# EAGLE board power_1.0 (EAGLE 9.5.2)
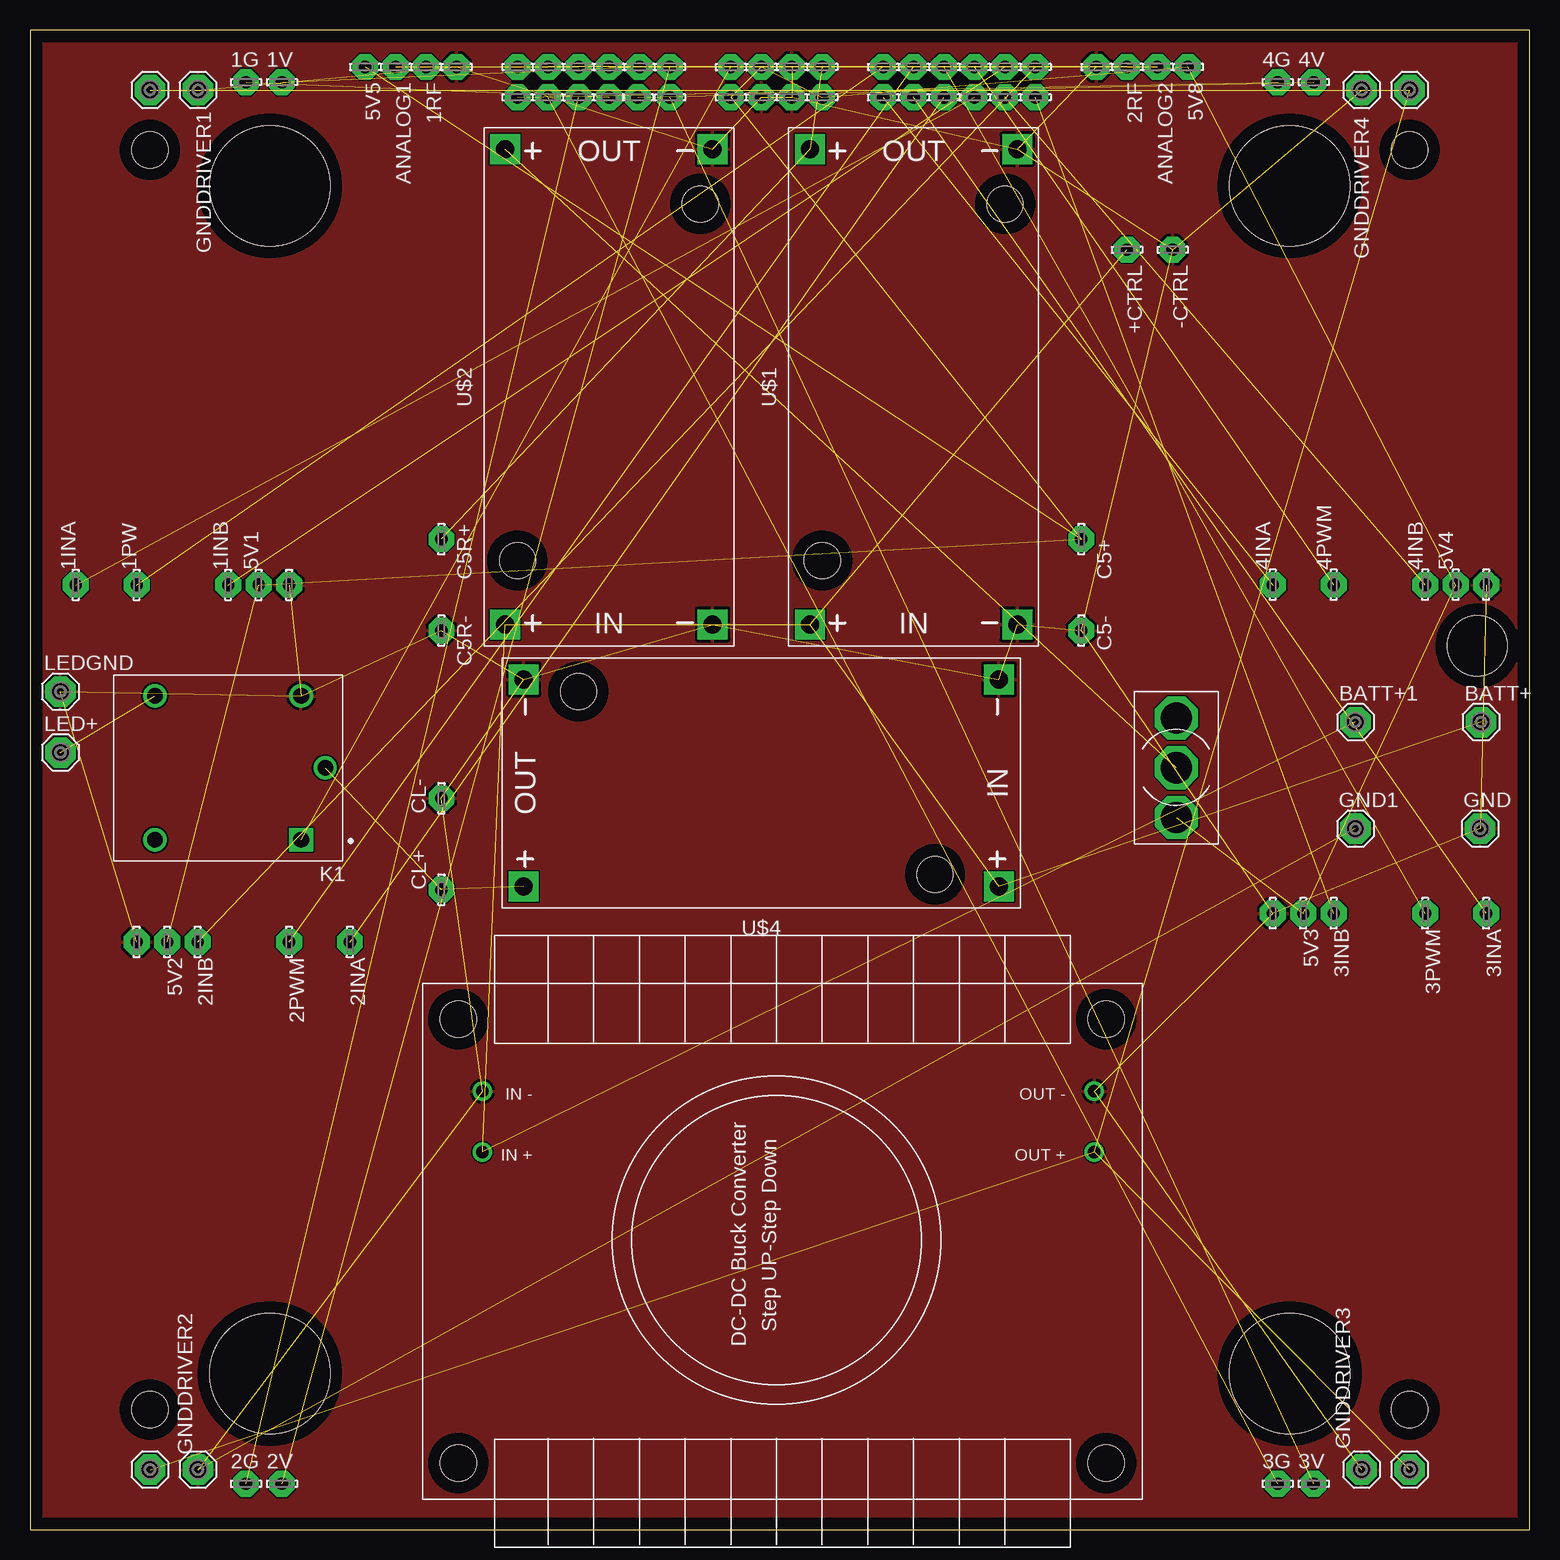
[diagram p0: board, top side]
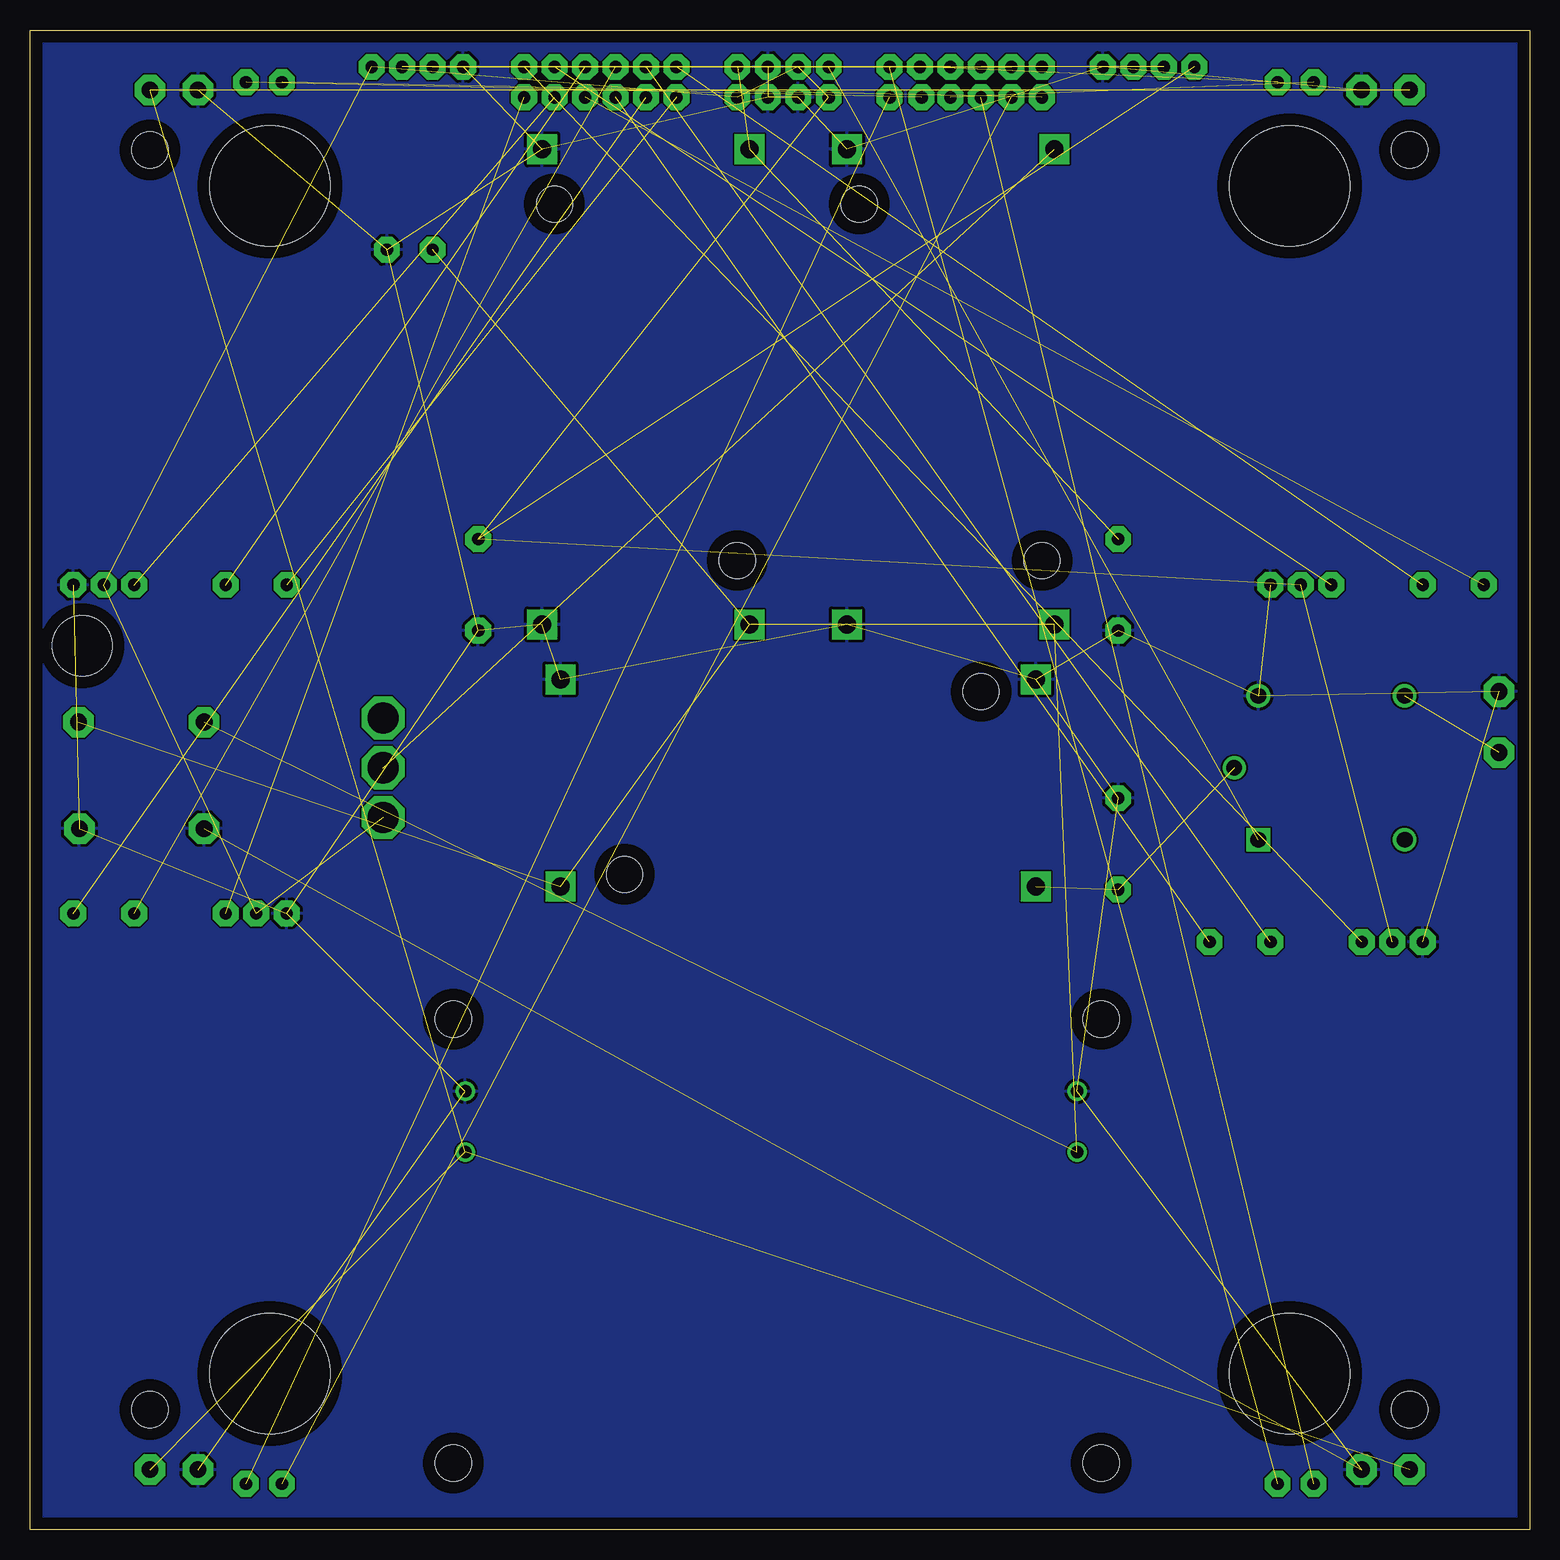
[diagram p1: board, bottom side, seen from below]

Size 125 x 125 mm. Coordinates in mm from the lower left corner, seen from the top.
Outline: 0,0 125,0 125,125 0,125 0,0
Copper layers (1*16): Top 0.035mm / dielectric 1.5mm / Bottom 0.035mm
Design rules "default": minimum track width 6mil, minimum drill 0.35mm, track to track 6mil, track to pad 6mil, pad to pad 6mil, via to via 6mil, smd to smd 6mil, copper to edge 40mil, drill to drill 6mil, minimum pad ring 10mil, minimum via ring 8mil, stop-mask expansion 4mil, vias tented up to drill 0mil, thermal gap 10mil
Net classes: 1 power: width 3 mm, clearance 1 mm
Holes 3 mm at 10,10 10,115 115,10 115,115
Holes 5 mm at 120.65,73.66
Holes 10 mm at 20,13 105,13 105,112 20,112

## Footprints (pad centres in the part's own frame; a part is rotated, then mirrored left to right if it is on the bottom)
LSP10 = drill 1.016 pad 2.159 octagon: MP 0,0
SE14 = drill 1.397 pad 2.54 octagon: MP 0,0
RELAY_SRD-05VDC-SL-C = drill 1.32 square: A1 -6.1,6 | drill 1.32: A2 -6.1,-6; NC 6.1,6; NO 6.1,-6 | drill 1.29: COM -8.1,0
DC-DC-STEP-DOWN-LM2596 = drill 1.5 pad 2.5 square: IN+ -19.812,8.636; IN- -19.812,-8.636; OUT+ 19.812,8.636; OUT- 19.812,-8.636 | hole 3: -14.478,7.62; 15.24,-7.62
DC-DCSTEPUP/DOWNBUCKCONVERTER = drill 1.067: IN+ 28.92,55; IN- 34,55; OUT+ 28.92,4; OUT- 34,4 | hole 3: 3,3; 40,3; 3,57; 40,57
SINGLE_SWITCH = drill 2.6 octagon: A0 2.2,3.5; A1 10.5,3.5; INT 6.35,3.5

## Placement (x,y rotation side)
1G  LSP10  [LSP10]  18,120.65 0 top
1G1  LSP10  [LSP10]  48.26,119.38 0 top
1INA  LSP10  [LSP10]  3.81,78.75 90 top
1INA1  LSP10  [LSP10]  78.74,119.38 0 top
1INB  LSP10  [LSP10]  16.51,78.75 90 top
1INB1  LSP10  [LSP10]  81.28,121.92 0 top
1PW  LSP10  [LSP10]  8.89,78.75 90 top
1PW1  LSP10  [LSP10]  71.12,121.92 0 top
1RF  LSP10  [LSP10]  33.02,121.92 0 top
1RF1  LSP10  [LSP10]  40.64,121.92 0 top
1V  LSP10  [LSP10]  21,120.65 0 top
1V1  LSP10  [LSP10]  50.8,121.92 0 top
2G  LSP10  [LSP10]  18,3.81 0 top
2G1  LSP10  [LSP10]  45.72,119.38 0 top
2INA  LSP10  [LSP10]  26.67,48.97 270 top
2INA1  LSP10  [LSP10]  76.2,119.38 0 top
2INB  LSP10  [LSP10]  13.97,48.97 270 top
2INB1  LSP10  [LSP10]  83.82,121.92 0 top
2PWM  LSP10  [LSP10]  21.59,48.97 270 top
2PWM1  LSP10  [LSP10]  73.66,121.92 0 top
2RF  LSP10  [LSP10]  91.44,121.92 0 top
2RF1  LSP10  [LSP10]  43.18,121.92 0 top
2V  LSP10  [LSP10]  21,3.81 0 top
2V1  LSP10  [LSP10]  53.34,121.92 0 top
3G  LSP10  [LSP10]  104,3.81 0 top
3G1  LSP10  [LSP10]  43.18,119.38 0 top
3INA  LSP10  [LSP10]  121.38,51.36 270 top
3INA1  LSP10  [LSP10]  73.66,119.38 0 top
3INB  LSP10  [LSP10]  108.68,51.36 270 top
3INB1  LSP10  [LSP10]  83.82,119.38 0 top
3PWM  LSP10  [LSP10]  116.3,51.36 270 top
3PWM1  LSP10  [LSP10]  76.2,121.92 0 top
3RF1  LSP10  [LSP10]  45.72,121.92 0 top
3V  LSP10  [LSP10]  107,3.81 0 top
3V1  LSP10  [LSP10]  53.34,119.38 0 top
4G  LSP10  [LSP10]  104,120.65 0 top
4G1  LSP10  [LSP10]  40.64,119.38 0 top
4INA  LSP10  [LSP10]  103.6,78.75 270 top
4INA1  LSP10  [LSP10]  71.12,119.38 0 top
4INB  LSP10  [LSP10]  116.3,78.75 270 top
4INB1  LSP10  [LSP10]  81.28,119.38 0 top
4PWM  LSP10  [LSP10]  108.68,78.75 270 top
4PWM1  LSP10  [LSP10]  78.74,121.92 0 top
4RF1  LSP10  [LSP10]  48.26,121.92 0 top
4V  LSP10  [LSP10]  107,120.65 0 top
4V1  LSP10  [LSP10]  50.67,119.38 0 top
5V  LSP10  [LSP10]  60.96,121.92 0 top
5V1  LSP10  [LSP10]  19.05,78.75 90 top
5V2  LSP10  [LSP10]  11.43,48.97 270 top
5V3  LSP10  [LSP10]  106.14,51.36 270 top
5V4  LSP10  [LSP10]  118.84,78.75 270 top
5V5  LSP10  [LSP10]  27.94,121.92 0 top
5V8  LSP10  [LSP10]  96.52,121.92 0 top
5V9  LSP10  [LSP10]  58.42,119.38 0 top
5V10  LSP10  [LSP10]  66.04,119.38 0 top
+CTRL  LSP10  [LSP10]  91.44,106.68 0 top
-CTRL  LSP10  [LSP10]  95.25,106.68 0 top
ANALOG1  LSP10  [LSP10]  30.48,121.92 0 top
ANALOG2  LSP10  [LSP10]  93.98,121.92 0 top
BATT+  SE14  [SE14]  120.96,67.31 0 top
BATT+1  SE14  [SE14]  110.49,67.31 0 top
C5+  LSP10  [LSP10]  87.63,82.55 270 top
C5-  LSP10  [LSP10]  87.63,74.93 270 top
C5-2  LSP10  [LSP10]  60.96,119.38 0 top
C5-3  LSP10  [LSP10]  63.5,119.38 0 top
C5R+  LSP10  [LSP10]  34.29,82.55 270 top
C5R-  LSP10  [LSP10]  34.29,74.93 270 top
CL+  LSP10  [LSP10]  34.29,53.34 90 top
CL-  LSP10  [LSP10]  34.29,60.96 90 top
GND  SE14  [SE14]  120.88,58.42 0 top
GND1  SE14  [SE14]  110.49,58.42 0 top
GNDDRIVER1  SE14  [SE14]  14,120 0 top
GNDDRIVER2  SE14  [SE14]  14,5 0 top
GNDDRIVER3  SE14  [SE14]  111,5 0 top
GNDDRIVER4  SE14  [SE14]  111,120 0 top
K1  SRD-05VDC-SL-C  [RELAY_SRD-05VDC-SL-C]  16.51,63.5 180 top
LED+  SE14  [SE14]  2.54,64.77 0 top
LEDGND  SE14  [SE14]  2.54,69.85 0 top
LSP1  LSP10  [LSP10]  21.59,78.75 90 top
LSP2  LSP10  [LSP10]  8.89,48.97 270 top
LSP4  LSP10  [LSP10]  103.6,51.36 270 top
LSP6  SE14  [SE14]  115,5 0 top
LSP7  SE14  [SE14]  10,5 0 top
LSP8  SE14  [SE14]  115,120 0 top
LSP9  SE14  [SE14]  10,120 0 top
LSP10  LSP10  [LSP10]  121.38,78.75 270 top
LSP12  LSP10  [LSP10]  88.9,121.92 0 top
LSP13  LSP10  [LSP10]  35.56,121.92 0 top
LSP14  LSP10  [LSP10]  63.5,121.92 0 top
MOSFET  LSP10  [LSP10]  58.42,121.92 0 top
RASPY5V  LSP10  [LSP10]  66.04,121.92 0 top
U$1  DC-DC-STEP-DOWN-LM2596  [DC-DC-STEP-DOWN-LM2596]  73.66,95.25 90 top
U$2  DC-DC-STEP-DOWN-LM2596  [DC-DC-STEP-DOWN-LM2596]  48.26,95.25 90 top
U$3  DC-DCSTEPUP/DOWNBUCKCONVERTER  [DC-DCSTEPUP/DOWNBUCKCONVERTER]  92.71,2.54 90 top
U$4  DC-DC-STEP-DOWN-LM2596  [DC-DC-STEP-DOWN-LM2596]  60.96,62.23 180 top
U$5  SINGE_SWITCH  [SINGLE_SWITCH]  99.06,57.15 90 top

## Library data of the parts
1G 1G1 1INA 1INA1 1INB 1INB1 1PW 1PW1 1RF 1RF1 1V 1V1 2G 2G1 2INA 2INA1 2INB 2INB1 2PWM 2PWM1 2RF 2RF1 2V 2V1 3G 3G1 3INA 3INA1 3INB 3INB1 3PWM 3PWM1 3RF1 3V 3V1 4G 4G1 4INA 4INA1 4INB 4INB1 4PWM 4PWM1 4RF1 4V 4V1 5V 5V1-5V5 5V8-5V10 +CTRL -CTRL ANALOG1 ANALOG2 BATT+ BATT+1 C5+ C5- C5-2 C5-3 C5R+ C5R- CL+ CL- GND GND1 GNDDRIVER1-GNDDRIVER4 LED+ LEDGND LSP1 LSP2 LSP4 LSP6-LSP10 LSP12-LSP14 MOSFET RASPY5V = solpad
K1 = SRD-05VDC-SL-C; AVAILABILITY: Unavailable; DESCRIPTION: 5V Trigger Relay Module For Arduino And Raspberry Pi 5V Trigger Relay Module For Arduino And Raspberry Pi; MF: Songle Relay; MP: SRD-05VDC-SL-C; PACKAGE: None; PRICE: None
U$1 U$2 U$4 = diy-modmod
U$3 = Buck Converter
U$5 = CdiClementina

## Nets
GND: -CTRL.MP C5-2.MP C5-3.MP C5-.MP C5R-.MP CL-.MP GND1.MP GND.MP GNDDRIVER1.MP GNDDRIVER2.MP GNDDRIVER3.MP GNDDRIVER4.MP K1.A2 LEDGND.MP LSP1.MP LSP2.MP LSP4.MP LSP10.MP LSP12.MP LSP13.MP LSP14.MP U$1.IN- U$1.OUT- U$2.IN- U$2.OUT- U$3.IN- U$3.OUT- U$4.IN- U$4.OUT-
N$1: U$2.OUT+ U$5.INT
N$2 [power]: LSP6.MP LSP7.MP LSP8.MP LSP9.MP U$3.OUT+
N$3: C5R+.MP RASPY5V.MP U$1.OUT+
N$4: 5V1.MP 5V2.MP 5V3.MP 5V4.MP 5V5.MP 5V8.MP 5V9.MP 5V10.MP 5V.MP C5+.MP U$5.A0
N$5: 4G1.MP 4G.MP
N$6: 3G1.MP 3G.MP
N$7: 2G1.MP 2G.MP
N$8: 1G1.MP 1G.MP
N$9: 4V1.MP 4V.MP
N$10: 3V1.MP 3V.MP
N$11: 2V1.MP 2V.MP
N$12: 1V1.MP 1V.MP
N$13: 4RF1.MP ANALOG2.MP
N$14: 3RF1.MP ANALOG1.MP
N$15: 2RF1.MP 2RF.MP
N$16: 1RF1.MP 1RF.MP
N$17: 1PW1.MP 1PW.MP
N$18: 2PWM1.MP 2PWM.MP
N$19: 4INA1.MP 4INA.MP
N$20: 3INA1.MP 3INA.MP
N$21: 2INA1.MP 2INA.MP
N$22: 1INA1.MP 1INA.MP
N$23: 4INB1.MP 4INB.MP
N$24: 3INB1.MP 3INB.MP
N$25: 3PWM1.MP 3PWM.MP
N$26: 4PWM1.MP 4PWM.MP
N$27: 1INB1.MP 1INB.MP
N$28: 2INB1.MP 2INB.MP
N$29 [power]: K1.NO LED+.MP
N$30: K1.A1 MOSFET.MP
N$31 [power]: CL+.MP K1.COM U$4.OUT+
N$35 [power]: +CTRL.MP BATT+1.MP BATT+.MP U$1.IN+ U$2.IN+ U$3.IN+ U$4.IN+

## Tracks (layer width: path | path; a pad name or v marks a point on that pad's centre or on a via)
GND  (28 unrouted)
  pour Top: -17.78,128.27 147.32,128.27 148.59,127 148.59,6.35 135.89,-6.35 -13.97,-6.35 -17.78,-2.54
  pour Bottom: -8.89,129.54 -8.89,-12.7 -1.27,-20.32 148.59,-20.32 153.67,-15.24 153.67,137.16 -1.27,137.16
N$1  (1 unrouted)
N$2  (4 unrouted)
N$3  (2 unrouted)
N$4  (10 unrouted)
N$5  (1 unrouted)
N$6  (1 unrouted)
N$7  (1 unrouted)
N$8  (1 unrouted)
N$9  (1 unrouted)
N$10  (1 unrouted)
N$11  (1 unrouted)
N$12  (1 unrouted)
N$13  (1 unrouted)
N$14  (1 unrouted)
N$15  (1 unrouted)
N$16  (1 unrouted)
N$17  (1 unrouted)
N$18  (1 unrouted)
N$19  (1 unrouted)
N$20  (1 unrouted)
N$21  (1 unrouted)
N$22  (1 unrouted)
N$23  (1 unrouted)
N$24  (1 unrouted)
N$25  (1 unrouted)
N$26  (1 unrouted)
N$27  (1 unrouted)
N$28  (1 unrouted)
N$29  (1 unrouted)
N$30  (1 unrouted)
N$31  (2 unrouted)
N$35  (6 unrouted)